# Altium PCB Coil_switch.PcbDoc
Units mil, origin at the board's own origin, x right, y up, seen from the top; angles counter-clockwise.
Board outline 7874.02 x 6692.91 mil, 2 copper layers (Top Layer, Bottom Layer); 108 components, 77 nets, 359 pads, 111 vias.
Unrouted connection lines stored in the file: 2.
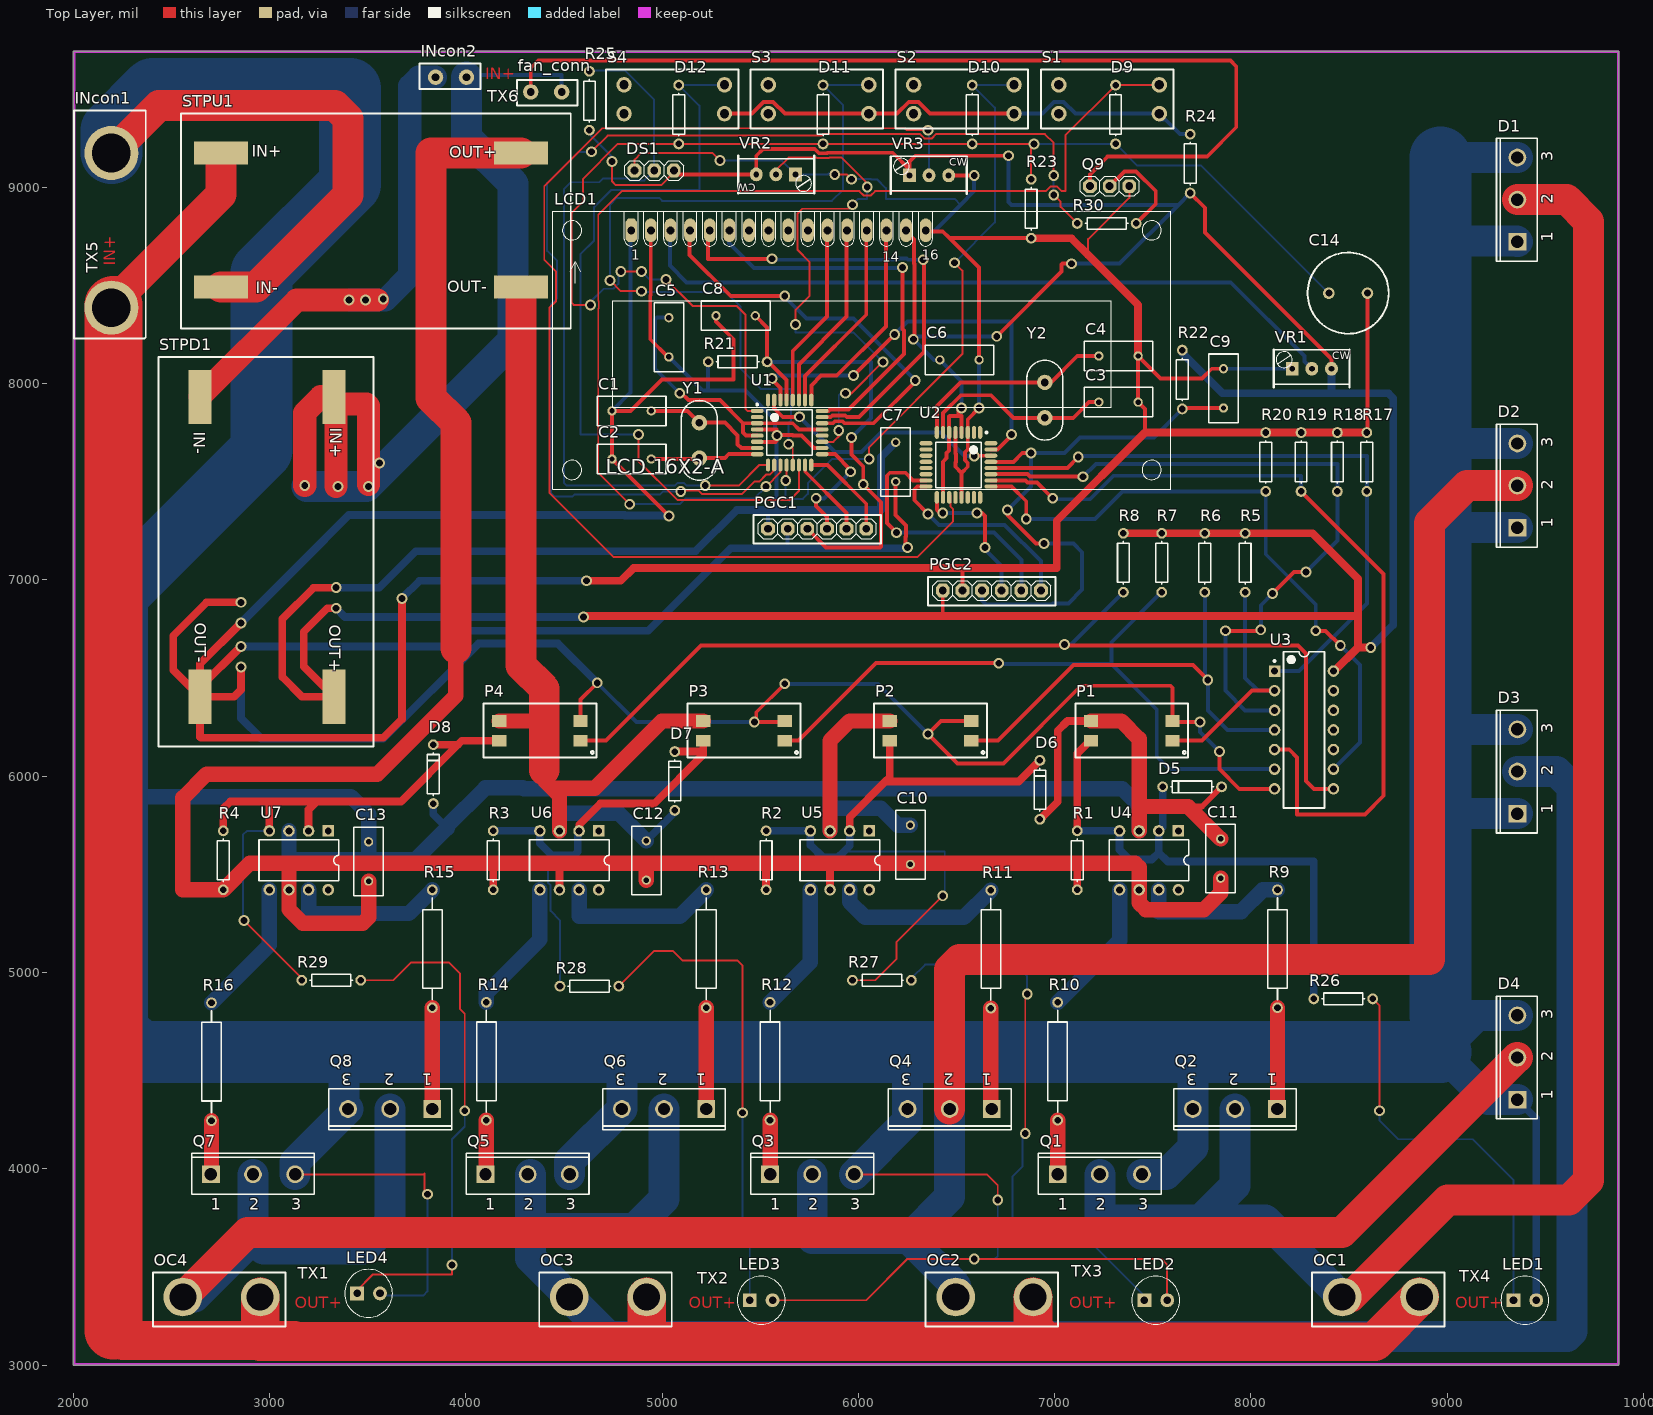
[diagram p0: Top Layer view]
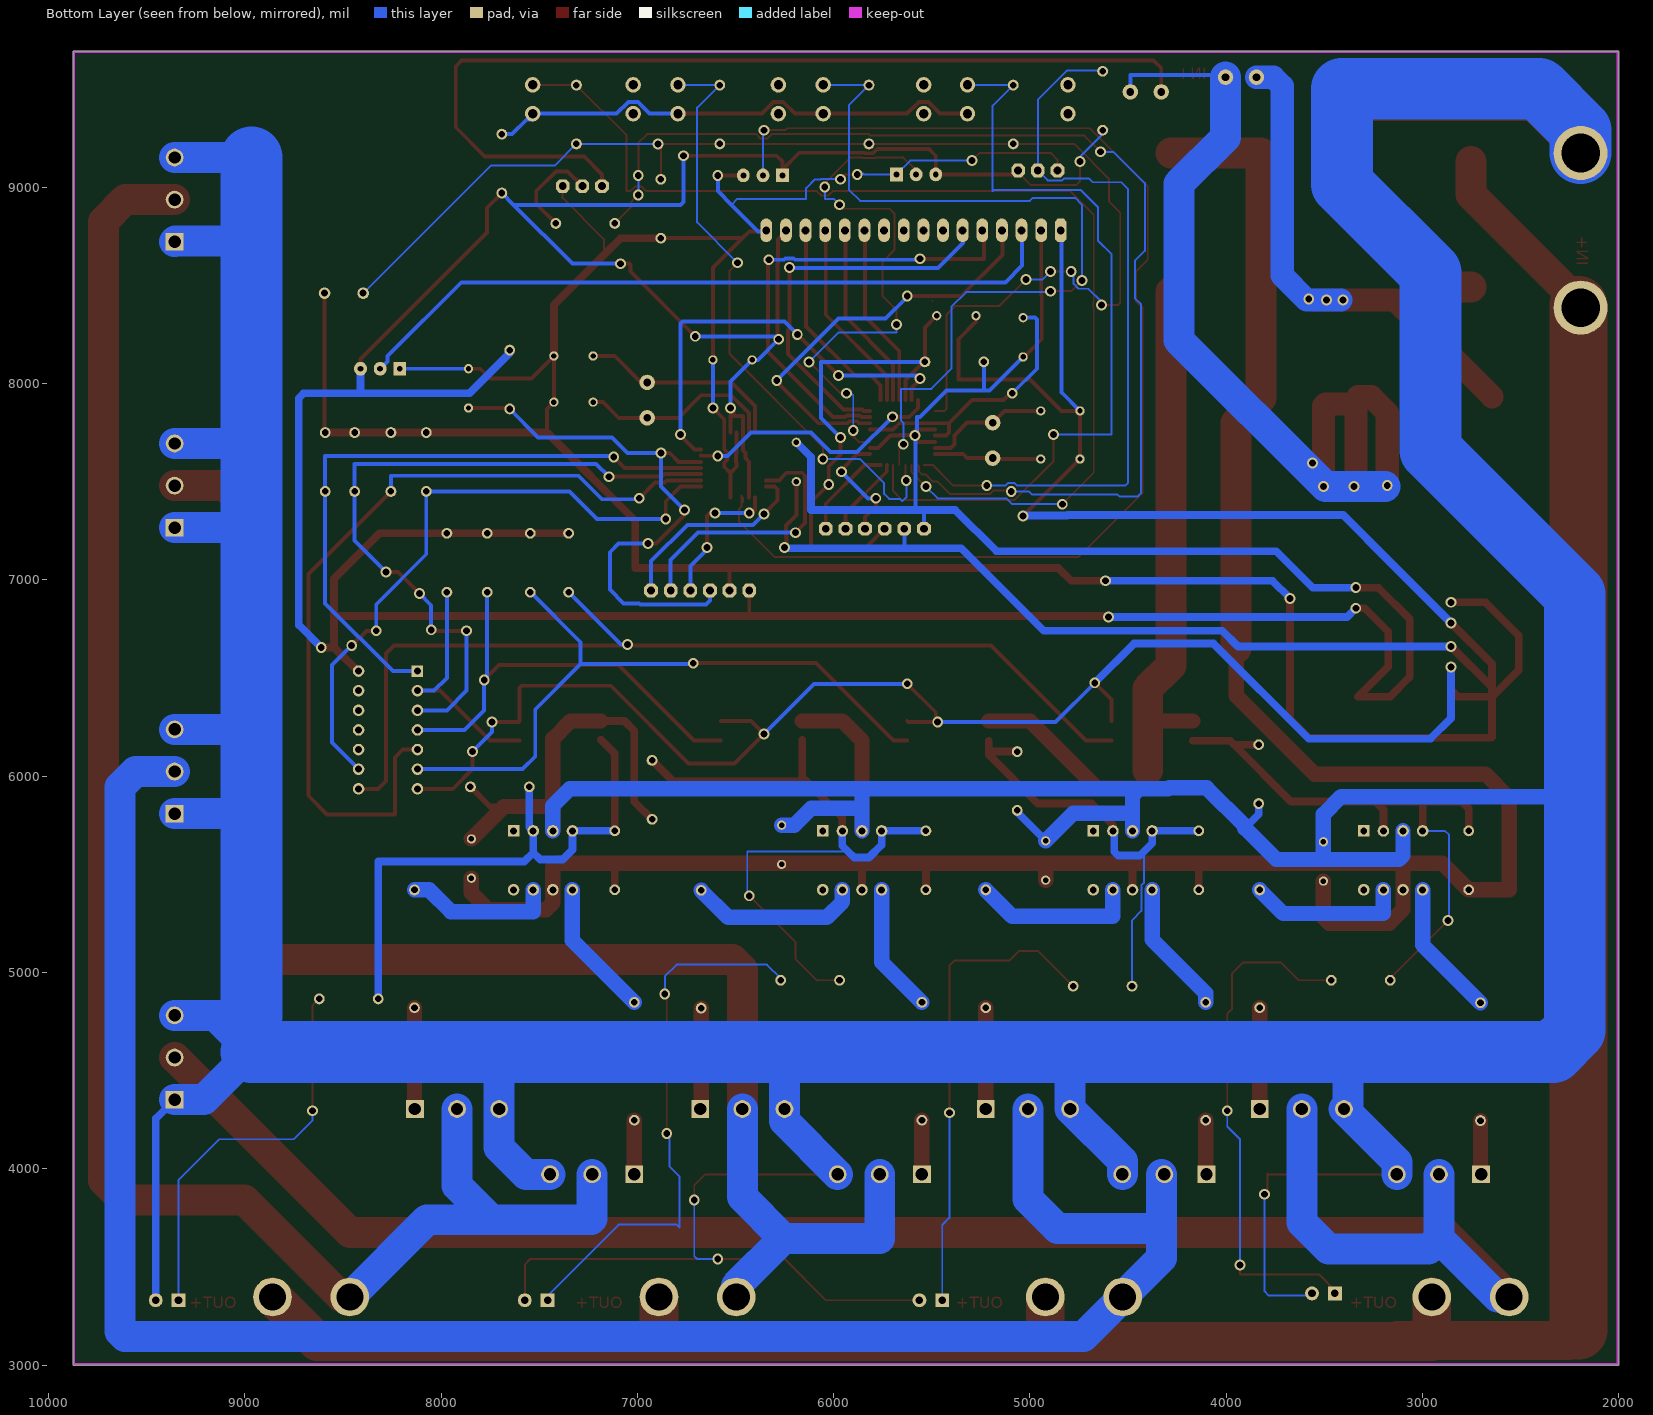
[diagram p1: Bottom Layer view, seen from below]

## Layer stack, top to bottom
Top Solder: solder mask 0.4, Solder Resist, Dk 3.5
Top Layer: signal copper 1.4
Dielectric 1: dielectric 12.6, FR-4, Dk 4.8
Bottom Layer: signal copper 1.4
Bottom Solder: solder mask 0.4, Solder Resist, Dk 3.5

## Board outline
2000,3000 9874.02,3000 9874.02,9692.91 2000,9692.91

## Design rules (kind name [scope] priority, off if disabled: settings)
Clearance [All] p1: gap=10
PolygonConnect [All] p1: connectstyle=Relief reliefconductorwidth=10 reliefentries=4 polygonreliefangle="90 Angle" airgapwidth=10
RoutingVias [All] p1: holewidth=35 width=550 viastyle="Through Hole" minholewidth=35 minwidth=55 maxholewidth=350 maxwidth=55
SolderMaskExpansion [All] p1: expansion=4
Width [All] p1: maxlimit=393.7 minlimit=10 preferedwidth=15
29 further rules are at their usual default settings.

## Components (designator, comment, footprint, x,y, rotation, side; value= is the part's Value field where it differs from the comment)
C1 "Cap" RAD-0.2 4845,7860 r180 top
C2 "Cap" RAD-0.2 4845,7615 r180 top
C3 "Cap" RAD-0.2 7325,7905 r0 top
C4 "Cap" RAD-0.2 7325,8140 r0 top
C5 "Cap" RAD-0.2 5035,8235 r90 top
C6 "Cap" RAD-0.2 6515,8120 r0 top
C7 "Cap" RAD-0.2 6190,7600 r270 top
C8 "Cap" RAD-0.2 5375,8345 r180 top
C9 "Cap" RAD-0.2 7860,7975 r270 top
C10 "Cap" RAD-0.2 6265,5650 r270 top
C11 "Cap" RAD-0.2 7845,5580 r90 top
C12 "Cap" RAD-0.2 4920,5570 r270 top
C13 "Cap" RAD-0.2 3505,5565 r270 top
C14 "Cap Pol2" RB5-10.5 8495,8460 r0 top
D1 "BYV52" TO-247AC 9351.89,8941.46 r90 top
D2 "BYV52" TO-247AC 9351.89,7484.76 r90 top
D3 "BYV52" TO-247AC 9351.89,6028.07 r90 top
D4 "BYV52" TO-247AC 9351.89,4571.38 r90 top
D5 "zener" AXIAL-0.3_Z 7700,5945 r180 top
D6 "zener" AXIAL-0.3_Z 6925,5930 r90 top
D7 "zener" AXIAL-0.3_Z 5065,5975 r90 top
D8 "zener" AXIAL-0.3_Z 3835,6010 r90 top
D9 "zener" AXIAL-0.3_Z 7310,9370.08 r270 top
D10 "zener" AXIAL-0.3_Z 6580,9370.08 r270 top
D11 "zener" AXIAL-0.3_Z 5820,9370.08 r270 top
D12 "zener" AXIAL-0.3_Z 5085,9370.08 r270 top
DS1 "ds1820" multi_turn 4960,9085 r180 top
fan_conn "IN_CONN" in_conn 4410,9485 r180 top
INcon1 "IN_POWER_CONN" IN_POWER_CONN 2195,8780 r90 top
INcon2 "IN_CONN" IN_CONN 3925,9560 r0 top
LCD1 "LCD_2X16" "LCD 16x2-A" 6017.9,8170 r0 top
LED1 "LED_5mm" led5mm 9395,3330 r0 top
LED2 "LED_5mm" led5mm 7515,3330 r0 top
LED3 "LED_5mm" led5mm 5505,3330 r0 top
LED4 "LED_5mm" led5mm 3505,3365 r0 top
OC1 "OUT_CONN" OUT_CONN 8661.42,3346.46 r180 top
OC2 "OUT_CONN" OUT_CONN 6692.91,3346.46 r180 top
OC3 "OUT_CONN" OUT_CONN 4724.41,3346.46 r180 top
OC4 "OUT_CONN" OUT_CONN 2755.91,3346.46 r180 top
P1 "EL817" EL817_SMD_S2 7380,6220.47 r180 top
P2 "EL817" EL817_SMD_S2 6355,6220.47 r180 top
P3 "EL817" EL817_SMD_S2 5405,6220.47 r180 top
P4 "EL817" EL817_SMD_S2 4365,6220.47 r180 top
PGC1 "PROGRAM_CONN" PROGRAM_CONN 5940,7260 r180 top
PGC2 "PROGRAM_CONN" PROGRAM_CONN 6830,6945 r180 top
Q1 "IRFP260" TO-247AC 7235,3976.38 r0 top
Q2 "IRFP260" TO-247AC 7913.39,4299.21 r180 top
Q3 "IRFP260" TO-247AC 5770,3976.38 r0 top
Q4 "IRFP260" TO-247AC 6460,4299.21 r180 top
Q5 "IRFP260" TO-247AC 4320,3976.38 r0 top
Q6 "IRFP260" TO-247AC 5005,4299.21 r180 top
Q7 "IRFP260" TO-247AC 2921.38,3976.38 r0 top
Q8 "IRFP260" TO-247AC 3610,4299.21 r180 top
Q9 "bc548" multi_turn 7280,9005 r180 top
R1 "Res_0.25W" AXIAL-0.3 7115,5570.87 r270 top
R2 "Res_0.25W" AXIAL-0.3 5530,5570.87 r270 top
R3 "Res_0.25W" AXIAL-0.3 4140,5570.87 r270 top
R4 "Res_0.25W" AXIAL-0.3 2765,5570.87 r270 top
R5 "Res_0.25W" AXIAL-0.3 7970,7086.61 r270 top
R6 "Res_0.25W" AXIAL-0.3 7765,7086.61 r270 top
R7 "Res_0.25W" AXIAL-0.3 7545,7086.61 r270 top
R8 "Res_0.25W" AXIAL-0.3 7350,7086.61 r270 top
R9 "Res_2W" AXIAL-0.6 8135,5120 r270 top
R10 "Res_2W" AXIAL-0.6 7015,4547.24 r270 top
R11 "Res_2W" AXIAL-0.6 6675,5118.11 r270 top
R12 "Res_2W" AXIAL-0.6 5550,4547.24 r270 top
R13 "Res_2W" AXIAL-0.6 5225,5120 r270 top
R14 "Res_2W" AXIAL-0.6 4105,4547.24 r270 top
R15 "Res_2W" AXIAL-0.6 3830,5120 r270 top
R16 "Res_2W" AXIAL-0.6 2705,4545 r270 top
R17 "Res_0.25W" AXIAL-0.3 8590,7600 r270 top
R18 "Res_0.25W" AXIAL-0.3 8440,7600 r270 top
R19 "Res_0.25W" AXIAL-0.3 8255,7600 r270 top
R20 "Res_0.25W" AXIAL-0.3 8075,7600 r270 top
R21 "Res_0.25W" AXIAL-0.3 5385,8110 r180 top
R22 "Res_0.25W" AXIAL-0.3 7650,8020 r90 top
R23 "Res_0.25W" AXIAL-0.3 6880,8890 r90 top
R24 "Res_0.25W" AXIAL-0.3 7690,9120 r270 top
R25 "Res_0.25W" AXIAL-0.3 4630,9440 r270 top
R26 "Res_0.25W" AXIAL-0.3 8470,4865 r180 top
R27 "Res_0.25W" AXIAL-0.3 6120,4960 r0 top
R28 "Res_0.25W" AXIAL-0.3 4630,4930 r180 top
R29 "Res_0.25W" AXIAL-0.3 3315,4960 r180 top
R30 "Res_0.25W" AXIAL-0.3 7265,8815 r180 top
S1 "SW-PB" PUSH_BUTTON 7280,9448.82 r180 top
S2 "SW-PB" PUSH_BUTTON 6540,9448.82 r180 top
S3 "SW-PB" PUSH_BUTTON 5800,9448.82 r180 top
S4 "SW-PB" PUSH_BUTTON 5065,9448.82 r180 top
STPD1 "LM2596_STP_DOWN" POWER_SWITCHING 2965,7130 r270 top
STPU1 "LM6009_STP_UP" POWER_SWITCHING 3555,8810 r0 top
TX1 "TEXT_OUT+" TEXT_OUT+ 10660,3160 r90 top
TX2 "TEXT_OUT+" TEXT_OUT+ 10425,3160 r90 top
TX3 "TEXT_OUT+" TEXT_OUT+ 10195,3160 r90 top
TX4 "TEXT_OUT+" TEXT_OUT+ 9965,3160 r90 top
TX5 "TEXT_IN+" TEXT_IN+ 9965,3160 r90 top
TX6 "TEXT_IN+" TEXT_IN+ 10195,3160 r90 top
U1 "ATmega8A-AU" 32A_N 5650,7750 r0 top
U2 "ATmega8A-AU" 32A_N 6510,7585 r270 top
U3 "7405" DIP-14 8270,6235 r0 top
U4 "MIC4423" 8P3 7480.31,5570.87 r180 top
U5 "MIC4423" 8P3 5905.51,5570.87 r180 top
U6 "MIC4423" 8P3 4527.56,5570.87 r180 top
U7 "MIC4423" 8P3 3149.61,5570.87 r180 top
VR1 "1K" "Multi Turn 02" 8210,8075 r90 top
VR2 "1K" "Multi Turn 02" 5680,9065 r270 top
VR3 "1K" "Multi Turn 02" 6260,9060 r90 top
Y1 "11.0592 MHz" CRYSTALL 5190,7710 r270 top
Y2 "11.0592 MHz" CRYSTALL 6950,7915 r90 top

## Footprints (in the part's own frame and the unit in brackets; to place one, negate y for a bottom-side part, rotate by r counter-clockwise, add the part's x,y. Pads: shape width x height; smd on the part's side, far side on the other; paste and mask are expansions set on the pad)
8P3 [mm] "DIP; 8 Leads; Row Spacing 7.62 mm; Pitch 2.54 mm"
  rect 1.5x1.5 hole 0.9: 1(-3.81,-3.81)
  round 1.5 hole 0.9: 2(-1.27,-3.81) 3(1.27,-3.81) 4(3.81,-3.81) 5(3.81,3.81) 6(1.27,3.81) 7(-1.27,3.81) 8(-3.81,3.81)
  silkscreen extent -5.15,-2.65 5.15,2.65
32A_N [mm] "Thin QFP, 32-Leads, Body 7x7mm, Pitch 0.8mm, IPC Medium Density"
  oval 1.65x0.55 smd: 1(-4.2,2.8) 2(-4.2,2) 3(-4.2,1.2) 4(-4.2,0.4) 5(-4.2,-0.4) 6(-4.2,-1.2) 7(-4.2,-2) 8(-4.2,-2.8) 17(4.2,-2.8) 18(4.2,-2) 19(4.2,-1.2) 20(4.2,-0.4) 21(4.2,0.4) 22(4.2,1.2) 23(4.2,2) 24(4.2,2.8)
  oval 0.55x1.65 smd: 9(-2.8,-4.2) 10(-2,-4.2) 11(-1.2,-4.2) 12(-0.4,-4.2) 13(0.4,-4.2) 14(1.2,-4.2) 15(2,-4.2) 16(2.8,-4.2) 25(2.8,4.2) 26(2,4.2) 27(1.2,4.2) 28(0.4,4.2) 29(-0.4,4.2) 30(-1.2,4.2) 31(-2,4.2) 32(-2.8,4.2)
  silkscreen extent -4.32,-2.95 2.95,3.75, body extent -3.5,-3.5 3.5,3.5, height 1.2
AXIAL-0.3 [mm] "Axial Device, Thru-Hole; 2 Leads; 0.3 in Pin Spacing"
  round 1.4 hole 0.85: 1(-3.81,0) 2(3.81,0)
  silkscreen extent -2.77,-0.76 2.77,0.76
AXIAL-0.3_Z [mm] "Axial Device, Thru-Hole; 2 Leads; 0.3 in Pin Spacing"
  round 1.4 hole 0.85: 1(-3.81,0) 2(3.81,0)
  silkscreen extent -2.77,-0.76 2.77,0.76
AXIAL-0.6 [mm] "Axial Device, Thru-Hole; 2 Leads; 0.6 in Pin Spacing"
  round 1.4 hole 0.85: 1(-7.62,0) 2(7.62,0)
  silkscreen extent -6.6,-1.27 6.6,1.27
CRYSTALL [mm]
  round 2 hole 1: 1(-2.293,0) 2(2.293,0)
  silkscreen extent -5.16,-2.32 5.16,2.32
DIP-14 [mm] "DIP; 14 Leads; Row Spacing 7.62 mm; Pitch 2.54 mm"
  rect 1.5x1.5 hole 0.9: 1(-3.81,7.62)
  round 1.5 hole 0.9: 2(-3.81,5.08) 3(-3.81,2.54) 4(-3.81,0) 5(-3.81,-2.54) 6(-3.81,-5.08) 7(-3.81,-7.62) 8(3.81,-7.62) 9(3.81,-5.08) 10(3.81,-2.54) 11(3.81,0) 12(3.81,2.54) 13(3.81,5.08) 14(3.81,7.62)
  silkscreen extent -3.93,-10.1 2.65,10.1, body extent -3.6,-10.1 3.6,10.1, height 5.08
EL817_SMD_S2 [mm]
  rect 1.85x1.5 smd: 1(-5.587,1.016) 2(-5.587,-1.524) 3(4.953,-1.524) 4(4.953,1.016)
  silkscreen extent -7.62,-3.81 6.98,3.18
in_conn [mm]
  round 2 hole 1: 1(-2,0) 2(2,0)
  silkscreen extent -4.06,-1.52 3.81,1.78
IN_CONN [mm]
  round 2 hole 1: 1(-2,0) 2(2,0)
  silkscreen extent -4.06,-1.52 3.81,1.78
IN_POWER_CONN [mm]
  round 7 hole 5: 1(-10,0) 2(10,0)
  silkscreen extent -13.97,-4.45 15.49,4.83
"LCD 16x2-A" [mil]
  oct 60x120 hole 40: 1(-1175,610)
  oval 60x120 hole 40: 2(-1075,610) 3(-975,610) 4(-875,610) 5(-775,610) 6(-675,610) 7(-575,610) 8(-475,610) 9(-375,610) 10(-275,610) 11(-175,610) 12(-75,610) 13(25,610) 14(125,610) 15(225,610) 16(325,610)
  silkscreen extent -1575,-709 1575,708
led5mm [mm]
  rect 1.8x1.8 hole 1: 1(-1.479,0)
  round 1.8 hole 1: 2(1.48,0)
  silkscreen extent -3.1,-3.1 3.1,3.1
"Multi Turn 02" [mil]
  rect 70x65 hole 30: 1(0,0)
  oval 70x65 hole 30: 2(0,-200) 3(0,-100)
  silkscreen extent -94,-291 96,94, body extent -73,-285 93,89, height 452
multi_turn [mil]
  oct 70x70 hole 40: 1(-100,0) 2(0,0) 3(100,0)
  silkscreen extent -150,-50 150,50
OUT_CONN [mm]
  round 5 hole 3.5: 1(-5,0) 2(5,0)
  silkscreen extent -8.25,-3.18 8.89,3.81
POWER_SWITCHING [mm]
  rect 7x3 smd: 1(-20.367,9.239) 2(-20.367,-8.101) 3(18.433,-8.101) 4(18.433,9.239)
  silkscreen extent -25.53,-13.46 24.89,14.35
PROGRAM_CONN [mil]
  oct 70x70 hole 40: 1(-100,0) 2(0,0) 3(100,0) 4(200,0) 5(300,0) 6(400,0)
  silkscreen extent -175,-70 475,75
PUSH_BUTTON [mm]
  round 2 hole 1.2: 1(-6.429,1.889) 2(-6.429,-1.831) 3(6.571,-1.831) 4(6.571,1.889)
  silkscreen extent -8.25,-3.81 8.89,3.81
RAD-0.2 [mm] "Radial Cap, Thru-Hole; 2 Leads; 0.2 in Pin Spacing"
  round 1.2 hole 0.7: 1(-2.54,0) 2(2.54,0)
  silkscreen extent -4.44,-1.91 4.44,1.91
RB5-10.5 [mm] "Capacitor (Radial); 2 Leads"
  round 1.5 hole 0.9: 1(-2.5,0) 2(2.5,0)
  silkscreen extent -5.25,-5.25 5.25,5.25
TEXT_IN+ [mil]
TEXT_OUT+ [mil]
TO-247AC [mm] "SIP with Mounting Hole; 3 Leads; Body 20 x 15.6 x 5 mm (typ); Pitch 5.45 mm"
  rect 2.3x2.3 hole 1.6: 1(-5.577,-0.127)
  round 2.3 hole 1.6: 2(-0.127,-0.127) 3(5.323,-0.127)
  silkscreen extent -8.08,-2.73 7.82,2.57

## Part data
C1 C2 C3 C4 C5 C6 C7 C8 C9 C10 C11 C12 C13: "Capacitor"
C14: "Polarized Capacitor (Radial)"
D1 D2 D3 D4: "IGH EFFICIENCY FAST RECOVERY RECTIFIER DIODES"
D5 D6 D7 D8 D9 D10 D11 D12: "2 PIN DIP"
LED1 LED2 LED3 LED4: "4 PIN DIP"
P1 P2 P3 P4: "4 PIN DIP PHOTOTRANSISTOR PHOTOCOUPLER  EL817 Series"
Q1 Q2 Q3 Q4 Q5 Q6 Q7 Q8: "HEXFET Power MOSFET"
R1 R2 R3 R4 R5 R6 R7 R8 R9 R10 R11 R12 R13 R14 R15 R16 R17 R18 R19 R20 R21 R22 R23 R24 R25 R26 R27 R28 R29 R30: "Resistor"
S1 S2 S3 S4: "Switch"
U1 U2: "8-bit AVR Microcontroller, 8KB Flash, 512 Bytes EEPROM, 1KB SRAM, 32-pin TQFP, Industrial Grade (-40°C to 85°C)"
VR1 VR2 VR3: library part "Resistor Variable", "Variable Resistor"
Y1 Y2: library part XTAL, "XTAL Crystal"

## Via types
v1: diameter 55, hole 35, Top Layer to Bottom Layer, 111 vias

## Nets (pads, with @x,y where several pads share a name; then routed paths per layer and width w, separated by ;. In a path a pad name is that pad's centre, name@x,y a point inside that pad or via, vN(x,y) a via of type N, cw(c..) or ccw(c..) an arc to the next point about the centre after c; other vN are vias at no path point)
A: P1.1 R5.2 U3.2 | length 1239
  Top Layer w20: P1.1 7750.47,6180.47 8005,6435 U3.2
  Bottom Layer w20: R5.2 7970,6500 8035,6435 U3.2
B: P2.1 R6.2 U3.4 | length 2384.6
  Top Layer w20: P2.1 6710.47,6180.47 7095,6565 7705,6565 v1(7780,6490)
  Bottom Layer w20: R6.2 7765,6505 v1(7780,6490) 7780,6335 7880,6235 U3.4
C: P3.1 R7.2 U3.6 | length 3495
  Top Layer w20: P3.1 5695.47,6180.47 6090,6575 v1(6715,6575)
  Bottom Layer w20: v1(6715,6575) 6720,6570 7290,6570 ; R7.2 7290,6681.61 7290,6570 ; U3.6 7585,6035 7520,6100 7520,6340 7290,6570
D: P4.1 R8.2 U3.8 | length 5129.3
  Top Layer w20: P4.1 4714.53,6180.47 5199.06,6665 8240,6665 8280,6625 8280,5975 8320,5935 U3.8
  Bottom Layer w20: v1(7050,6670) 7083.39,6670 R8.2
FAN: R30.2 U1.10 | length 6032.3
  Top Layer w10: v1(4640,9180) 4722.64,9262.64 5812.64,9262.64 5820,9270 6314.9,9270 6337.32,9247.58 6372.53,9247.58 6394.95,9270 6950,9270 6995,9225 v1(6995,9060) ; v1(5095,7450) 5100,7455 5184.9,7455 5202.4,7437.5 5407.5,7437.5 5470,7500 5494.9,7500 5532.06,7537.17 5550.46,7537.17 5565.59,7552.29 5565.59,7578.98 U1.10 ; v1(6995,8960) 7030,8925 7030,8900 R30.2
  Bottom Layer w10: v1(4640,9180) 4575,9180 4415,9020 4415,8675 4465,8625 4465,8435 4435,8405 4435,7440 4450,7425 4545,7425 4555,7435 4990,7435 5005,7450 v1(5095,7450) ; v1(6995,8960) v1(6995,9060)
GND: C1.2 C2.2 C3.2 C4.2 C5.2 C6.2 C7.2 C8.2 C9.1 C14.2 DS1.3 LCD1.1 LCD1.16 P1.2 P2.2 P3.2 P4.2 PGC1.5 PGC2.5 Q9.1 R17.1 R18.1 R19.1 R20.1 R23.1 STPD1.3 U1.3 U1.5 U1.21 U2.3 U2.5 U2.21 U3.7 VR1.1 VR2.1 VR3.2 | length 35243
  Top Layer w10: DS1.3 4860,9140 4895,9175 5255,9175 v1(5295,9135) ; v1(5880,9065) 5940,9065 v1(5965,9040) ; 7170,8655 7170,8735 7380,8945 Q9.1
  Top Layer w20: P4.2 4584.96,6389.96 v1(4670,6475) ; v1(5035,7325) C2.2 C1.2 4840,7860 5000,8020 5365,8020 5365,8225 5275,8315 C8.2 ; v1(5090,7950) 5100,7950 5135,7915 5294.49,7915 5412.24,7797.24 ; U1.5 5428.17,7734.25 5412.24,7750.18 5412.24,7797.24 ; P3.2 5619.49,6275 v1(5470,6275) 5480,6285 5480,6325 v1(5625,6470) ; U1.21 5697.08,7765.75 5665.58,7797.24 5412.24,7797.24 ; C7.2 6190,7330 6242.5,7277.5 6242.5,7220.32 6240,7217.82 6240,7175 v1(6250,7165) ; LCD1.16@6340,8775 6430,8775 6465,8740 ; VR3.2 v1(6590,9060) ; U2.5 6494.25,7642.92 6497.5,7639.68 6497.5,7600.32 6494.25,7597.08 6494.25,7575.75 6525.75,7544.25 ; U2.21 6525.75,7544.25 ; PGC2.5 6530,7055 6535,7060 ; P2.2 6420.47,6280.47 v1(6355,6215) 6505,6065 6740,6065 7135,6460 7589.92,6460 7599.96,6449.96 P1.2 7605.43,6275 v1(7740,6275) ; v1(6615,7875) 6557.24,7817.24 6557.24,7664.42 6542.5,7649.68 6542.5,7610.32 6557.24,7595.58 6557.24,7575.75 6525.75,7544.25 ; C6.2 6615,8590 6465,8740 ; R23.1 6465,8740 ; 7460,7750 7460,7870 C3.2 C4.2 7540,8025 7750,8025 7800,8075 C9.1 ; v1(7840,6125) 7840,6035 7940,5935 U3.7 ; R17.1 8593.43,7753.43 C14.2
  Top Layer w39.37: v1(2855,6555) 2855,6440 2819.29,6404.29 STPD1.3 ; v1(2855,6660) STPD1.3@2646.06,6451.06 ; v1(2855,6780) 2646.06,6571.06 STPD1.3@2646.06,6451.06 ; v1(2855,6885) 2680,6885 2510,6715 2510,6540.35 STPD1.3 ; v1(3675,6905) 3675,6290 3580,6195 2650,6195 2646.06,6198.94 STPD1.3 ; v1(4615,6995) 4790,6995 4855,7060 6535,7060 7010,7060 7010,7300 7460,7750 R20.1 R19.1 R18.1 R17.1 ; STPD1.3 STPD1.3@2646.06,6451.06
  Top Layer w40: R23.1 7085,8740 7170,8655 7425,8400 C4.2
  Bottom Layer w10: v1(5295,9135) 5610,9135 VR2.1 5845,9065 5850,9070 5875,9070 v1(5880,9065) ; v1(5965,9040) 5967.5,9042.5 6062.6,9042.5 6065.1,9040 6095,9040 6140,8995 6140,8940 6490,8940 6520,8910
  Bottom Layer w20: v1(4670,6475) 4870,6275 v1(5470,6275) ; C1.2 4840,7955 LCD1.1@4840,8775 ; C5.2 4975,8335 4965,8325 4965,8075 v1(5090,7950) ; v1(5625,6470) 6100,6470 v1(6355,6215) ; 5640,7160 PGC1.5 ; LCD1.16@6340,8775 6385,8775 6520,8910 6590,8980 v1(6590,9060) ; v1(6615,7875) C6.2 ; v1(7740,6275) 7740,6225 v1(7840,6125) ; C9.1 VR1.1
  Bottom Layer w39.37: v1(2855,6555) 2855,6295 2960,6190 3580,6190 4065,6675 4470,6675 v1(4670,6475) ; v1(2855,6660) 3940,6660 4020,6740 4930,6740 5350,7160 5640,7160 v1@6255,7160 ; v1(2855,6780) 3282.81,7207.81 3282.81,7208.69 3404.13,7330 4809.13,7330 4811.31,7327.81 v1@5035,7327.81 ; v1(3675,6905) 3765,6995 v1(4615,6995)
GND_POWER: C10.1 C11.2 C12.1 C13.1 D1.1 D1.3 D2.1 D2.3 D3.1 D3.3 D4.1 D4.3 D5.1 D6.1 D7.1 D8.1 INcon1.2 LED1.2 LED2.2 LED3.2 LED4.2 P1.3 P2.3 P3.3 P4.3 Q1.3 Q2.3 Q3.3 Q4.3 Q5.3 Q6.3 Q7.3 Q8.3 STPU1.2 STPU1.3 U4.3 U5.3 U6.3 U7.3 | length 48082.2
  Top Layer w10: Q7.3 3786.38,3971.38 3790,3975 3790,3885 v1(3805,3870) ; LED3.2 6040,3330 6250,3540 v1(6590,3540) 7545,3540 7573.25,3511.75 LED2.2 ; Q3.3 6653.62,3971.38 6710,3915 v1(6710,3840)
  Top Layer w30: 7680,5845 7750,5845 D5.1
  Top Layer w39.37: D6.1 7015,5870 7015,6230 7065.47,6280.47 P1.3
  Top Layer w78.74: P4.3 4394.53,6280.47 4400,6275 ; 4400,6030 4400,5980 4442.5,5937.5 ; U6.3 4477.56,5902.44 4442.5,5937.5 ; P3.3 4999.53,6280.47 4656.56,5937.5 4442.5,5937.5 ; U5.3 5855.51,6180.51 5955.47,6280.47 P2.3 ; P1.3 7339.53,6280.47 7430.31,6189.69 U4.3 ; 7430.31,5845 7680,5845 C11.2
  Top Layer w157.48: INcon1.2 2436.3,9415 3335,9415 3400,9350 3400,8960 2931.06,8491.06 STPU1.2 ; STPU1.3@4280.71,8465 4280.71,6564.29 4400,6445 4400,6275 4400,6030
  Bottom Layer w10: LED4.2 3573.25,3355 3785,3355 3805,3375 v1(3805,3870) ; v1(6590,3540) 6695,3540 6710,3555 v1(6710,3840)
  Bottom Layer w30: 4477.56,5800 4487.56,5810
  Bottom Layer w39.37: D8.1 3835,5805 3905,5735 ; C12.1 5065,5815 D7.1 ; D4.1 9453.25,4255.45 LED1.2
  Bottom Layer w78.74: 2225,5895 3415,5895 3505,5805 C13.1 3505,5575 ; U7.3 3099.61,5595.39 3120,5575 3505,5575 ; U6.3 4477.56,5800 4477.56,5902.44 4445,5935 ; 4487.56,5810 4780,5810 C12.1 ; U5.3 5855.51,5835 ; C10.1 6200,5750 6115,5835 5855.51,5835 ; U4.3 7430.31,5849.69 7345,5935 5875,5935 ; 3505,5575 3745,5575 3905,5735 3905,5745 4100,5940 4290,5940 4295,5935 4445,5935 ; 4445,5935 5875,5935 ; 5855.51,5835 5855.51,5915.51 5875,5935
  Bottom Layer w157.48: Q7.3 3130.95,4034.73 Q8.3 3380,4324.65 3380,4595 ; Q5.3 4529.57,4038.35 Q6.3 4795.43,4594.57 4795,4595 ; Q3.3 6250.43,4242.24 6250.43,4579.57 6235,4595 ; Q1.3 7566.38,3971.38 7703.82,4108.82 7703.82,4586.18 7695,4595 ; 8965,4780.95 9150.95,4780.95 ; 8965,5805 8968.5,5808.5 D3.1 ; 8965,6210 8992.64,6237.64 D3.3 ; 8965,7255 8975.2,7265.2 D2.1 ; 8965,7695 8965.67,7694.33 D2.3 ; 8965,8725 9353.78,8725 D1.1 ; 8965,9151.02 D1.3 ; D4.1 9208.19,4351.81 8965,4595 9150.95,4780.95 ; D4.3 9150.95,4780.95
  Bottom Layer w314.96: INcon1.2 2195,9290 2406.61,9501.61 3410,9501.61 3410,9015 2960,8565 2960,7660 2225,6925 2225,5895 2225,4705 2335,4595 3380,4595 4795,4595 6235,4595 7695,4595 8965,4595 ; 8965,4780.95 8965,5805 8965,6210 8965,7255 8965,7695 8965,8725 8965,9151.02
MISO1: PGC1.1 U1.16 | length 488.7
  Top Layer w20: U1.16 5842.53,7584.65 6040,7387.18 PGC1.1
MISO2: PGC2.1 U2.16 | length 1044.2
  Top Layer w20: U2.16 6299.76,7474.76 6285,7460 6285,7405 v1(6355,7335)
  Bottom Layer w20: v1(6355,7335) 6410,7280 6745,7280 6930,7095 PGC2.1
MOSI1: PGC1.2 U1.15 | length 412.2
  Top Layer w20: U1.15 5729.41,7583.98 5729.41,7550.22 5940,7339.63 PGC1.2
MOSI2: PGC2.2 U2.15 | length 1380.6
  Top Layer w20: v1(6195,7240) 6145,7290 6145,7530 6160,7545 6240,7545 6278.74,7506.26 U2.15
  Bottom Layer w20: v1(6195,7240) 6690,7240 6830,7100 PGC2.2
NetC1_1: C1.1 U1.7 Y1.1 | length 644.2
  Top Layer w20: C1.1 5130.28,7860 Y1.1 5319.72,7800.28 5385,7735 5385,7690 5403.74,7671.26 U1.7
NetC2_1: C2.1 U1.8 Y1.2 | length 549.9
  Top Layer w20: C2.1 5185.28,7615 Y1.2 5319.72,7619.72 5339.76,7639.76 U1.8
NetC3_1: C3.1 U2.7 Y2.1 | length 1010.7
  Top Layer w20: U2.7 6431.93,7751.02 6431.93,7849.1 6522.82,7940 6675,7940 6790.28,7824.72 Y2.1 7094.72,7824.72 7175,7905 C3.1
NetC4_1: C4.1 U2.8 Y2.2 | length 1065.4
  Top Layer w20: U2.8 6399.76,7884.76 6520.28,8005.28 Y2.2 6980.28,8005.28 7115,8140 C4.1
NetD1_2: D1.2 OC1.2 Q1.2 Q2.2 | length 9057.6
  Top Layer w157.48: OC1.2 8506.46,3346.46 9000,3840 9620,3840 9720,3940 9720,8825 9608.54,8936.46 D1.2
  Bottom Layer w10: 7230,3745 7235,3740
  Bottom Layer w157.48: 7230,3745 Q1.2 ; 7235,3740 7745,3740 ; Q2.2 7918.39,3913.39 7745,3740 ; OC1.2 8071.02,3740 7745,3740
NetD2_2: D2.2 OC2.2 Q3.2 Q4.2 | length 7888
  Top Layer w157.48: Q4.2 6465,5015 6515,5065 8910,5065 8910,7290 9099.76,7479.76 D2.2
  Bottom Layer w157.48: Q3.2 5765,3645 6255,3645 ; Q4.2 6465,3855 6255,3645 ; OC2.2 6496.06,3403.94 6255,3645
NetD3_2: D3.2 OC3.2 Q5.2 Q6.2 | length 10196.2
  Bottom Layer w157.48: Q5.2@4330,3971.38 4330,3700 ; Q6.2 5010,3845 4860,3695 4335,3695 4330,3700 ; D3.2 9556.93,6023.07 9635,5945 9635,3170 9610.83,3145.83 4728.19,3145.83 4330,3544.02 4330,3700
NetD4_2: D4.2 OC4.2 Q7.2 Q8.2 | length 9467.3
  Top Layer w157.48: OC4.2 2887.6,3675 8464.03,3675 9355.41,4566.38 D4.2
  Bottom Layer w157.48: OC4.2 2619.21,3346.46 2916.38,3643.62 ; Q7.2 2916.38,3643.62 ; Q8.2 3615,3725 3480,3590 2970,3590 2916.38,3643.62
NetD5_2: D5.2 P1.4 R1.1 R26.2 U4.2 U4.4 | length 2891.1
  Top Layer w39.37: R1.1 7115,6115 P1.4@7185,6185
  Bottom Layer w39.37: R1.1 U4.4 7330.31,5624.69 7380,5575 7495,5575 7530.31,5610.31 ; D5.2 7550,5740.55 U4.2 7530.31,5610.31 ; R26.2 8320,5565 7575.63,5565 7530.31,5610.31
NetD6_2: D6.2 P2.4 R2.1 R27.1 U5.2 U5.4 | length 3436.9
  Top Layer w10: R27.1 6085,4960 6195,5070 6195,5155 v1(6430,5390)
  Top Layer w39.37: U5.2 5955.51,5790.51 6137.5,5972.5 ; P2.4@6160,6185 P2.4 6160,5995 6137.5,5972.5 ; D6.2 6817.5,5972.5 6137.5,5972.5
  Bottom Layer w10: 5925,5615 6440,5615 6440,5400 v1(6430,5390)
  Bottom Layer w39.37: R2.1 U5.4 5755.51,5649.49 5820,5585 5895,5585 5925,5615 5955.51,5645.51 U5.2
NetD7_2: D7.2 P3.4 R3.1 R28.2 U6.2 U6.4 | length 2380.3
  Top Layer w39.37: U6.2 4577.56,5752.56 4685,5860 4960,5860 5210,6110 ; D7.2 5195,6125 5210,6110 ; P3.4 5210,6110
  Bottom Layer w10: 4420,5615 4420,5455.32 4431.93,5443.39 4431.93,5313.07 4480,5265 R28.2
  Bottom Layer w39.37: R3.1 U6.4 4377.56,5657.44 4420,5615 4440,5595 4550,5595 4570,5615 4570,5713.31 U6.2
NetD8_2: D8.2 P4.4 R4.1 R29.2 U7.2 U7.4 | length 3111.7
  Top Layer w10: v1(2870,5265) 3165,4970 R29.2
  Top Layer w39.37: R4.1 2765,5835 2800,5870 2995,5870 ; U7.4 2999.61,5865.39 2995,5870 ; U7.2 3199.61,5829.61 3240,5870 ; D8.2 3960,6160 ; P4.4 3980.47,6180.47 3960,6160 ; 2995,5870 3240,5870 ; 3240,5870 3670,5870 3960,6160
  Bottom Layer w10: v1(2870,5265) 2865,5270 2865,5700 2885.87,5720.87 U7.4
Netfan_conn_2: fan_conn.2 Q9.3 | length 4957.9
  Top Layer w20: fan_conn.2 4331.26,9606.26 4370,9645 7895,9645 7925,9615 7925,9305 7775,9155 7270,9155 7180,9065 Q9.3
NetINcon2_1: INcon2.1 STPD1.2 | length 2574.9
  Top Layer w118.11: STPD1.2 3139.21,8425 3550,8425
  Bottom Layer w118.11: v1@3415,8425 3590,8425 3715,8550 3715,9515 3760,9560 INcon2.1
  other v1: 3405,8425 3490,8425 3580,8430
NetLCD1_3: LCD1.3 VR1.3 | length 3678.2
  Bottom Layer w20: LCD1.3@5040,8775 5040,8600 5125,8515 7896.87,8515 8272.19,8139.69 8272.19,8112.81 VR1.3
NetLCD1_4: LCD1.4 U1.22 | length 2114.3
  Top Layer w20: LCD1.4@5140,8775 5140,8655 5350,8445 v1(5625,8445) ; U1.22 5870.07,7797.24 5880.32,7807.5 5919.68,7807.5 5929.93,7797.24 6077.24,7797.24 6290,8010 v1(6290,8015)
  Bottom Layer w20: v1(5625,8445) 5625,8440 5735,8330 5975,8330 v1(6290,8015)
NetLCD1_5: LCD1.5 U1.23 | length 2384.5
  Top Layer w20: LCD1.5@5240,8775 5235,8770 5235,8635 v1(5560,8635) ; U1.23 5859.14,7828.74 5867.9,7837.5 5932.1,7837.5 5940.86,7828.74 6003.74,7828.74 6335,8160 6335,8630 v1(6330,8630)
  Bottom Layer w20: v1(5560,8635) 5565,8630 6197.82,8630 6205.32,8637.5 6244.68,8637.5 6252.18,8630 v1(6330,8630)
NetLCD1_6: LCD1.6 U1.24 | length 1978.9
  Top Layer w20: U1.24 5848.21,7860.24 5855.47,7867.5 5949.68,7867.5 6232.5,8150.32 6232.5,8269.68 6225,8277.18 v1(6225,8590)
  Bottom Layer w20: LCD1.6@5340,8775 5340,8715 5467.5,8587.5 6222.5,8587.5 v1(6225,8590)
NetLCD1_11: LCD1.11 U1.28 | length 931.8
  Top Layer w20: U1.28 5665.75,8165.75 5840,8340 LCD1.11@5840,8775
NetLCD1_12: LCD1.12 U1.27 | length 960.2
  Top Layer w20: U1.27 5697.24,8097.24 5940,8340 LCD1.12@5940,8775
NetLCD1_13: LCD1.13 U1.26 | length 988.6
  Top Layer w20: U1.26 5728.74,8038.74 6040,8350 LCD1.13@6040,8775
NetLCD1_14: LCD1.14 U1.25 | length 1063.8
  Top Layer w20: U1.25 5760.24,7990.24 5810,8040 5890,8040 6140,8290 LCD1.14@6140,8775
NetLED1_1: LED1.1 R26.1 | length 2054.5
  Top Layer w10: R26.1 8655,4830 v1(8655,4295)
  Bottom Layer w10: v1(8655,4295) 8655,4245 8750,4150 9130,4150 9336.75,3943.25 LED1.1
NetLED2_1: LED2.1 R27.2 | length 2816
  Top Layer w10: v1(6850,4180) 6850,4880 v1(6860,4890)
  Bottom Layer w10: R27.2 6270,4970 6340,5040 6800,5040 6860,4980 v1(6860,4890) ; v1(6850,4180) 6835,4165 6835,4010 6785,3960 6785,3700 6800,3715 7095,3715 7456.75,3353.25 LED2.1
NetLED3_1: LED3.1 R28.1 | length 2455.8
  Top Layer w10: R28.1 4960,5110 5055,5110 5105,5060 5385,5060 5410,5035 v1(5410,4285)
  Bottom Layer w10: v1(5410,4285) 5410,3750 5446.75,3713.25 LED3.1
NetLED4_1: LED4.1 R29.1 | length 2669.8
  Top Layer w10: LED4.1 3446.75,3381.75 3525,3460 3930,3460 v1(3930,3510) ; R29.1 3630,4960 3720,5050 3915,5050 3970,4995 3970,4815 3995,4790 v1(3995,4295)
  Bottom Layer w10: v1(3930,3510) 3930,4150 3995,4215 v1(3995,4295)
NetQ1_1: Q1.1 R10.2 | length 276
  Top Layer w39.37: Q1.1@7015,3971.81 Q1.1
  Top Layer w78.74: Q1.1@7015,3971.81 R10.2
NetQ2_1: Q2.1 R9.2 | length 516.6
  Top Layer w39.37: Q2.1 Q2.1@8135,4306.26
  Top Layer w78.74: Q2.1@8135,4306.26 R9.2
NetQ3_1: Q3.1 R12.2 | length 276
  Top Layer w39.37: Q3.1@5550,3971.81 Q3.1
  Top Layer w78.74: Q3.1@5550,3971.81 R12.2
NetQ4_1: Q4.1 R11.2 | length 515.8
  Top Layer w39.37: Q4.1@6675,4308.78 Q4.1
  Top Layer w78.74: Q4.1@6675,4308.78 R11.2
NetQ5_1: Q5.1 R14.2 | length 277.8
  Top Layer w39.37: Q5.1 Q5.1@4105,3975.94
  Top Layer w78.74: Q5.1@4105,3975.94 R14.2
NetQ6_1: Q6.1 R13.2 | length 516
  Top Layer w39.37: Q6.1 Q6.1@5225,4304.65
  Top Layer w78.74: Q6.1@5225,4304.65 R13.2
NetQ7_1: Q7.1 R16.2 | length 274.9
  Top Layer w39.37: Q7.1 Q7.1@2705,3974.57
  Top Layer w78.74: Q7.1@2705,3974.57 R16.2
NetQ8_1: Q8.1 R15.2 | length 516
  Top Layer w39.37: Q8.1 Q8.1@3830,4304.65
  Top Layer w78.74: Q8.1@3830,4304.65 R15.2
NetQ9_2: Q9.2 R30.1 | length 513.9
  Top Layer w20: Q9.2 7355,9080 7415,9080 7515,8980 7515,8915 R30.1
NetR9_1: R9.1 U4.7 | length 761.1
  Bottom Layer w78.74: U4.7 7530.31,5310 7950,5310 8060,5420 R9.1
NetR10_1: R10.1 U4.5 | length 704.2
  Bottom Layer w78.74: R10.1 7330.31,5162.56 U4.5
NetR11_1: R11.1 U5.7 | length 871
  Bottom Layer w78.74: U5.7 5955.51,5359.49 6035,5280 6536.89,5280 R11.1
NetR12_1: R12.1 U5.5 | length 658.7
  Bottom Layer w78.74: R12.1 5755.51,5052.76 U5.5
NetR13_1: R13.1 U6.7 | length 839.2
  Bottom Layer w78.74: U6.7 4577.56,5285 5090,5285 R13.1
NetR14_1: R14.1 U6.5 | length 686.5
  Bottom Layer w78.74: R14.1 4105,4895 4377.56,5167.56 U6.5
NetR15_1: R15.1 U7.7 | length 801
  Bottom Layer w78.74: U7.7 3199.61,5300 3710,5300 R15.1
NetR16_1: R16.1 U7.5 | length 697.9
  Bottom Layer w78.74: R16.1 2999.61,5139.61 U7.5
NetR17_2: R17.2 U2.28 U3.1 | length 3302.7
  Top Layer w20: U2.28 7064.25,7569.25 v1(7120,7625)
  Bottom Layer w20: v1(7120,7625) 7125,7630 8590,7630 R17.2 8590,6880 8245,6535 U3.1
NetR18_2: R18.2 U2.27 U3.3 | length 3617
  Top Layer w20: U2.27 6862.24,7537.76 6875,7525 v1(7145,7525) ; v1(7870,6740) 8045,6740 v1(8050,6745) ; v1(8110,6930) 8220,7040 v1(8280,7040)
  Bottom Layer w20: v1(7145,7525) 7210,7590 8440,7590 R18.2 8440,7200 v1(8280,7040) ; v1(7870,6740) 7870,6435 7970,6335 U3.3 ; v1(8050,6745) 8050,6870 v1(8110,6930)
NetR19_2: R19.2 U2.26 U3.5 | length 4374.1
  Top Layer w20: U2.26 6851.31,7506.26 6862.57,7495 6910,7495 v1(6990,7415) ; U3.5 8195,6135 8235,6095 8235,5805 8580,5805 8675,5900 8675,7030 R19.2
  Bottom Layer w20: v1(6990,7415) 6995,7410 7180,7410 7300,7530 8255,7530 R19.2
NetR20_2: R20.2 U2.25 U3.9 | length 3277.6
  Top Layer w20: U2.25 6780.24,7474.76 6855,7400 v1(6855,7310) ; v1(8330,6740) 8380,6740 v1(8455,6665)
  Bottom Layer w20: v1(6855,7310) 7205,7310 7345,7450 R20.2 8075,7130 8330,6875 v1(8330,6740) ; U3.9 8555,6170 8555,6565 v1(8455,6665)
NetR24_1: R24.1 S1.1 S2.1 S3.1 S4.1 | length 2550.3
  Top Layer w20: S4.1 5457.34,9374.45 5516.71,9433.82 5565.89,9433.82 5625.26,9374.45 6197.34,9374.45 6256.71,9433.82 6305.89,9433.82 6365.26,9374.45 S2.1
  Bottom Layer w20: S2.1 6937.34,9374.45 6996.71,9433.82 7045.89,9433.82 7105.26,9374.45 S1.1 ; S1.1@7533.11,9344.45 7563.11,9344.45 7637.56,9270 R24.1
NetU1_19: U1.19 VR2.3 | length 2813.7
  Top Layer w10: VR2.3 5580,9085 5645,9150 5787.46,9150 5789.95,9147.52 5850.05,9147.52 5852.54,9150 5915.1,9150 6045,9020.1 v1(6045,9000) ; v1(5680,8300) 5680,8375 5750,8445 5750,8620 5690,8680 5690,8865 5715,8890 5950,8890 v1(5970,8910) ; U1.19 5872.76,7702.76 5910,7740 5910,7750 v1(5900,7760) ; v1(5935,7950) 5965,7950 v1(6125,8110)
  Bottom Layer w10: v1(5680,8300) 5680,8260 5975,8260 v1(6125,8110) ; v1(5900,7760) 5900,7940 5910,7950 5915,7945 5930,7945 v1(5935,7950) ; v1(5970,8910) 6000,8940 6045,8940 v1(6045,9000)
NetU2_19: U2.19 VR3.3 | length 6343.3
  Top Layer w10: v1(6354.92,9290.08) 6246.35,9290.08 6236.43,9300 4695,9300 4400,9005 4400,8630 4460,8570 4460,8420 4426.57,8386.57 4426.57,7443.43 4755,7115 6300,7115 6481.34,7296.34 6481.34,7361.47 6468.43,7374.38 U2.19@6468.43,7430 ; U2.19@6462.76,7395 U2.19
  Bottom Layer w10: v1(6354.92,9290.08) 6360,9285 VR3.3
RST1: C8.1 PGC1.4 R21.1 U1.29 | length 2489.8
  Top Layer w20: C8.1 5535,8285 R21.1 5542.18,8110 5634.25,8017.92 U1.29 ; PGC1.4 5835,7165 6110,7165 6115,7170 6115,7395 v1(6025,7485) 6025,7577.82 5965,7637.82 v1(5965,7725)
  Bottom Layer w20: R21.1 6065,8110 6065,7825 v1(5965,7725)
RST2: C9.2 PGC2.4 R22.1 U2.29 | length 2911
  Top Layer w20: U2.29 6790.75,7600.75 6835,7645 v1(6880,7645) ; v1(6760,7355) 6760,7330 6905,7185 v1(6945,7185) ; R22.1 7655,7875 C9.2
  Bottom Layer w20: PGC2.4 6630,6895 6650,6875 6985,6875 6990,6880 7070,6880 7140,6950 7140,7140 7095,7185 v1(6945,7185) ; v1(6760,7355) 6880,7475 v1(6880,7645) 7050,7645 7130,7725 7505,7725 R22.1
RXD: U1.31 U2.30 | length 1330.4
  Top Layer w20: U1.31 5571.26,7873.74 5615,7830 v1(5700,7830) ; v1(6590,7630) 6591.57,7631.57 6674.68,7631.57 U2.30
  Bottom Layer w20: v1(5700,7830) 5880,7650 6015,7650 6115,7750 6420,7750 6540,7630 v1(6590,7630)
SCK1: PGC1.3 U1.17 | length 596.4
  Top Layer w20: v1(5785,7415) 5785,7375 5840,7320 PGC1.3 ; U1.17 5880.24,7639.76 5960,7560 v1(5960,7550)
  Bottom Layer w20: v1(5785,7415) 5825,7415 v1(5960,7550)
SCK2: PGC2.3 U2.17 | length 735.3
  Top Layer w20: U2.17 6399.76,7357.41 6402.5,7354.68 6402.5,7352.5 6410,7345 v1@6430,7345 ; v1(6605,7340) 6630,7340 6645,7325 v1(6645,7165)
  Bottom Layer w20: v1(6430,7340) v1(6605,7340) ; v1(6645,7165) 6645,7155 6730,7070 PGC2.3
SW1: D9.1 S1.2 U1.11 | length 5751.5
  Top Layer w10: v1(4835,7385) 4675,7545 4675,8379.9 4677.5,8382.4 4677.5,8417.6 4675,8420.1 4675,8860 4795,8980 6004.9,8980 6027.4,8957.5 6062.6,8957.5 6085.1,8980 6954.9,8980 6977.4,9002.5 7012.6,9002.5 7035.1,8980 7055,8980 7055,9265.08 D9.1 7310.83,9520.91 S1.2 ; v1(5530,7475) 5602.76,7547.76 U1.11
  Bottom Layer w10: v1(4835,7385) 5090.1,7385 5120.1,7415 5470,7415 v1(5530,7475)
SW2: D10.1 S2.2 U1.12 | length 3185.4
  Top Layer w10: v1(5630,7505) 5634.25,7509.25 U1.12 ; v1(6055,7615) 6055,7675 6530,8150 6530,8575 v1(6490,8615)
  Bottom Layer w10: v1(5630,7505) 5630,7420 5650,7400 5662.5,7412.5 5717.6,7412.5 5742.5,7437.4 5742.5,7492.5 5865,7615 v1(6055,7615) ; v1(6490,8615) 6695,8820 6695,9405.08 D10.1 6580.83,9520.91 S2.2
SW3: D11.1 S3.2 U1.13 | length 4163
  Top Layer w10: v1(4735,8525) 4790,8470 v1(4895,8470) ; v1(5645,7690) 5665.75,7669.25 U1.13
  Bottom Layer w10: v1(4735,8525) 4735,8910 4770,8945 4985,8945 5000,8930 5865,8930 5922.5,8987.5 5922.5,9417.58 D11.1 5820.83,9520.91 S3.2 ; v1(4895,8470) 4900,8465 5325,8465 5400,8390 5400,8075 5502.5,7972.5 5657.5,7972.5 5657.5,7812.4 5645,7799.9 v1(5645,7690)
SW4: D12.1 S4.2 U1.14 | length 4058.3
  Top Layer w10: v1(4880,7740) 4880,7604.9 5077.4,7407.5 5652.5,7407.5 5697.24,7452.24 U1.14
  Bottom Layer w10: v1(4880,7740) 4585,7740 4585,8659.59 4653.43,8728.02 4653.43,8898.43 4740,8985 5185,8985 5190,8980 5190,9415.08 D12.1 5085.83,9520.91 S4.2
SW_INT: C14.1 D9.2 D10.2 D11.2 D12.2 R23.2 U1.1 | length 6665.7
  Top Layer w10: v1(4635,8400) 4550,8400 4540,8410 4540,8870 4597.5,8927.5 4597.5,9042.6 4774.97,9220.08 D12.2 D11.2 D10.2 6580.08,9220 v1(6895,9220) 6880,9205 R23.2 ; v1(4790,8570) v1(4895,8570) ; v1(5020,8530) 5155.38,8394.62 5380,8394.62 5425,8349.62 5425,7870 5434.76,7860.24 U1.1 ; 5495.38,8419.62 5495.38,8420
  Bottom Layer w10: v1(4635,8400) 4640,8400 4640,8420 4702.5,8482.5 4752.6,8482.5 4777.5,8507.4 4777.5,8557.5 v1(4790,8570) ; v1(4895,8570) 4935,8530 v1(5020,8530) ; v1(6895,9220) 6895.08,9220.08 D9.2 7420.08,9110 7746.57,9110 C14.1
TEMP: DS1.2 R25.1 U1.9 | length 3878.9
  Top Layer w10: v1(5220,7480) 5390,7480 5494.65,7584.65 U1.9
  Bottom Layer w10: R25.1@4605,9595 4809.1,9595 4960,9444.1 DS1.2 4910,9035 4836.29,9035 4826.29,9045 4700,9045 4680,9025 4535,9025 4500,8990 4500,7495 4515,7480 5064.9,7480 5077.4,7492.5 5112.6,7492.5 5125.1,7480 v1(5220,7480)
TXD: U1.30 U2.31 | length 2176.3
  Top Layer w20: v1(5560,8025) 5560,8020 5602.76,7977.24 U1.30 ; v1(5975,8040) v1(6185,8250) ; U2.31 6676.02,7664.41 6709.78,7664.41 6780.37,7735 v1(6780.37,7739.63)
  Bottom Layer w20: v1(5560,8025) 5575,8040 v1(5975,8040) ; v1(6185,8250) 6250,8315 6770,8315 6780.37,8304.63 v1(6780.37,7739.63)
VCC: C5.1 C6.1 C7.1 DS1.1 LCD1.2 LCD1.15 PGC1.6 PGC2.6 R5.1 R6.1 R7.1 R8.1 R21.2 R22.2 R24.2 R25.2 STPD1.4 U1.4 U1.6 U1.18 U2.4 U2.6 U2.18 U3.14 VR1.2 VR2.2 VR3.1 | length 25664.2
  Top Layer w10: v1(4745,9130) 4745,9030 4765,9010 4995,9010 5060,9075 DS1.1
  Top Layer w20: LCD1.2@4940,8775 4942.5,8772.5 4942.5,8450.32 4940,8447.82 4940,8225 C5.1@5030,8135 ; DS1.1 5080,9065 VR2.2 5480,9160 5515.08,9195.08 5777.74,9195.08 5800.3,9172.52 5839.7,9172.52 5842.18,9175 6175,9175 VR3.1@6260,9090 ; U1.6 5577.76,7702.76 5584.25,7709.25 5584.25,7765.75 U1.4 ; v1(5585,7735) 5587.5,7737.5 5664.68,7737.5 5667.18,7735 5710,7735 5773.74,7671.26 U1.18 ; LCD1.15@6240,8775 6282.5,8732.5 6282.5,8610.32 6285,8607.82 6285,8225 v1(6280,8225) ; VR3.1 VR3.1@6260,9090 ; 6430,6815 PGC2.6 ; U2.18 6431.26,7601.26 6450,7620 6450,7645 6462.76,7657.76 6462.76,7831.26 6465.75,7834.25 6510,7834.25 ; v1(6525,7875) 6510,7860 6510,7834.25 ; U2.4 6525.75,7834.25 6510,7834.25 ; v1(6705,8240) 7035,8570 7035,8605 7040,8610 v1(7085,8610) ; v1(6765,9160) 6290,9160 6260,9130 VR3.1@6260,9090 ; R24.2 7765,8895 7765,8770 8410,8125 VR1.2
  Top Layer w39.37: v1(3340,6855) 3295,6855 3175,6735 3175,6558.03 STPD1.4 3165.71,6404.29 3065,6505 3065,6800 3225,6960 v1(3340,6960) ; v1(4600,6810) 4605,6815 6430,6815 8545,6815 ; C5.1@5030,8135 C5.1 ; R8.1 R7.1 R6.1 R5.1 8313.39,7236.61 8545,7005 8545,6815 ; U3.14 8425,6535 8545,6655 ; v1(8610,6655) 8605,6660 8600,6655 8545,6655 ; 8545,6655 8545,6815
  Bottom Layer w10: R25.2@4605,9295 4745,9155 v1(4745,9130)
  Bottom Layer w20: C5.1 5205,7965 5225,7965 ; R21.2 5235,7975 5225,7965 ; PGC1.6 5540,7355 ; 5585,7355 5582.5,7357.5 5582.5,7732.5 v1(5585,7735) 5575,7745 5575,7830 5560,7830 5425,7965 5225,7965 ; v1(6525,7875) 6525,8010 C6.1 6385,8120 v1(6280,8225) 6295,8240 v1(6705,8240) ; v1(6765,9160) 6765,8925 6780,8910 7630,8910 ; v1(7085,8610) 7330,8610 7630,8910 ; R24.2 7630,8910
  Bottom Layer w39.37: v1(3340,6855) 3385,6810 v1(4600,6810) ; v1(3340,6960) 3560,6960 3745,7145 5170,7145 5380,7355 5540,7355 5585,7355 6115,7355 6115,7625 C7.1 ; R22.2 7650,8155 7855,7950 8415,7950 ; VR1.2 8410,7955 8415,7950 ; v1(8610,6655) 8725,6770 8725,7925 8700,7950 8415,7950
VCC_IN: fan_conn.1 INcon2.2 STPD1.1 | length 4914.2
  Top Layer w118.11: v1(3180,7480) 3180,7850 3261.85,7931.85 STPD1.1 ; v1@3338.74,7476.26 3338.74,7895 3495,7895 3505,7885 v1@3505,7485
  Bottom Layer w20: INcon2.2 4015,9571.26 4488.74,9571.26 fan_conn.1
  Bottom Layer w157.48: v1@3190,7475 3495,7475 4240,8220 4240,9017.48 4003.74,9253.74 INcon2.2
  other v1: 3350,7475 3505,7475 3560,7595
VCC_MAIN: INcon1.1 OC1.1 OC2.1 OC3.1 OC4.1 STPU1.1 | length 13789.8
  Top Layer w157.48: INcon1.1 2195,8405 2753.15,8963.15 STPU1.1@2753.15,9130
  Top Layer w196.85: 2255,3125 3125.98,3125 ; OC4.1 2952.76,3120 4921.26,3120 OC3.1 ; 4921.26,3153.35 4954.61,3120 6954.61,3120 6889.76,3184.84 OC2.1 ; 6955.28,3119.33 8631.14,3119.33 OC1.1
  Top Layer w295.28: 2205,3175 INcon1.1@2205,8400
VCC_POWER: C10.2 C11.1 C12.2 C13.2 R1.2 R2.2 R3.2 R4.2 STPU1.4 U4.6 U5.6 U6.6 U7.6 | length 12607.6
  Top Layer w39.37: 3099.61,5554.61 3100,5555 ; 4135,5555 4140,5550 R3.2 ; 4475,5555 4477.56,5552.44 U6.6 ; R2.2 5530,5540 5545,5555 ; 5855,5555 5855.51,5554.49 U5.6 ; 7105,5555 7115,5545 R1.2
  Top Layer w78.74: 3099.61,5554.61 U7.6 3099.61,5320.39 3170,5250 3475,5250 3505,5280 C13.2 ; 3950,6615 3950,6410 3550,6010 2680,6010 2559.13,5889.13 2559.13,5420.87 R4.2 2899.13,5555 3100,5555 4135,5555 4475,5555 4910,5555 ; C12.2 4920,5545 4910,5555 ; C11.1 7845,5405 7760,5320 7465,5320 7430.31,5354.69 U4.6 7430.31,5534.69 7410,5555 7105,5555 5855,5555 5545,5555 4910,5555
  Top Layer w157.48: 3950,6650 3950,7800 3823.74,7926.26 3823.74,9173.74 STPU1.4
pads on no net: LCD1.7 LCD1.8 LCD1.9 LCD1.10 S1.3 S1.4 S2.3 S2.4 S3.3 S3.4 S4.3 S4.4 U1.2 U1.20 U1.32 U2.1 U2.2 U2.9 U2.10 U2.11 U2.12 U2.13 U2.14 U2.20 U2.22 U2.23 U2.24 U2.32 U3.10 U3.11 U3.12 U3.13 U4.1 U4.8 U5.1 U5.8 U6.1 U6.8 U7.1 U7.8

## Keep-outs
Keep-Out Layer:
  lines w11.81: 2005,3005 2005,9690 9870,9690 9870,3005 2005,3005

## Text inside footprints (layer, text, board x,y; h text height)
D1: Top Overlay "3" at 9537.01,9131.02 h59.06 r90; Top Overlay "2" at 9537.01,8916.46 h59.06 r90; Top Overlay "1" at 9537.01,8721.89 h59.06 r90
D2: Top Overlay "3" at 9537.01,7674.33 h59.06 r90; Top Overlay "2" at 9537.01,7459.76 h59.06 r90; Top Overlay "1" at 9537.01,7265.2 h59.06 r90
D3: Top Overlay "3" at 9537.01,6217.64 h59.06 r90; Top Overlay "2" at 9537.01,6003.07 h59.06 r90; Top Overlay "1" at 9537.01,5808.5 h59.06 r90
D4: Top Overlay "3" at 9537.01,4760.94 h59.06 r90; Top Overlay "2" at 9537.01,4546.38 h59.06 r90; Top Overlay "1" at 9537.01,4351.81 h59.06 r90
LCD1: Top Overlay "14" at 6122.9,8620 h50; Top Overlay "1" at 4842.9,8630 h50; Top Overlay "16" at 6322.9,8630 h50; Top Overlay "LCD 16X2-A" at 4712.9,7540 h75
Q1: Top Overlay "3" at 7424.57,3791.26 h59.06; Top Overlay "2" at 7210,3791.26 h59.06; Top Overlay "1" at 7015.43,3791.26 h59.06
Q2: Top Overlay "3" at 7723.82,4484.33 h59.06 r180; Top Overlay "2" at 7938.39,4484.33 h59.06 r180; Top Overlay "1" at 8132.95,4484.33 h59.06 r180
Q3: Top Overlay "3" at 5959.57,3791.26 h59.06; Top Overlay "2" at 5745,3791.26 h59.06; Top Overlay "1" at 5550.43,3791.26 h59.06
Q4: Top Overlay "3" at 6270.43,4484.33 h59.06 r180; Top Overlay "2" at 6485,4484.33 h59.06 r180; Top Overlay "1" at 6679.57,4484.33 h59.06 r180
Q5: Top Overlay "3" at 4509.57,3791.26 h59.06; Top Overlay "2" at 4295,3791.26 h59.06; Top Overlay "1" at 4100.43,3791.26 h59.06
Q6: Top Overlay "3" at 4815.43,4484.33 h59.06 r180; Top Overlay "2" at 5030,4484.33 h59.06 r180; Top Overlay "1" at 5224.57,4484.33 h59.06 r180
Q7: Top Overlay "3" at 3110.94,3791.26 h59.06; Top Overlay "2" at 2896.38,3791.26 h59.06; Top Overlay "1" at 2701.81,3791.26 h59.06
Q8: Top Overlay "3" at 3420.43,4484.33 h59.06 r180; Top Overlay "2" at 3635,4484.33 h59.06 r180; Top Overlay "1" at 3829.57,4484.33 h59.06 r180
STPD1: Top Overlay "OUT+" at 3305,6770 h60 r270; Top Overlay "IN+" at 3310,7775 h60 r270; Top Overlay "OUT-" at 2620,6780 h60 r270; Top Overlay "IN-" at 2615,7755 h60 r270
STPU1: Top Overlay "OUT+" at 3915,9150 h60; Top Overlay "IN+" at 2910,9155 h60; Top Overlay "OUT-" at 3905,8465 h60; Top Overlay "IN-" at 2930,8460 h60
TX1: Top Layer "OUT+" at 3130,3290 h60
TX2: Top Layer "OUT+" at 5135,3290 h60
TX3: Top Layer "OUT+" at 7075,3290 h60
TX4: Top Layer "OUT+" at 9040,3290 h60
TX5: Top Layer "IN+" at 2215,8600 h60 r90
TX6: Top Layer "IN+" at 4100,9550 h60
VR1: Top Overlay "CW" at 8413,8123 h39.37
VR2: Top Overlay "CW" at 5477,9017 h39.37 r180
VR3: Top Overlay "CW" at 6463,9108 h39.37